# Altium PCB 6P1.PcbDoc
Units mil, origin at the board's own origin, x right, y up, seen from the top; angles counter-clockwise.
Board outline 2135 x 1345 mil, 2 copper layers (Top Layer, Bottom Layer); 3 components, 8 nets, 30 pads, 0 vias.
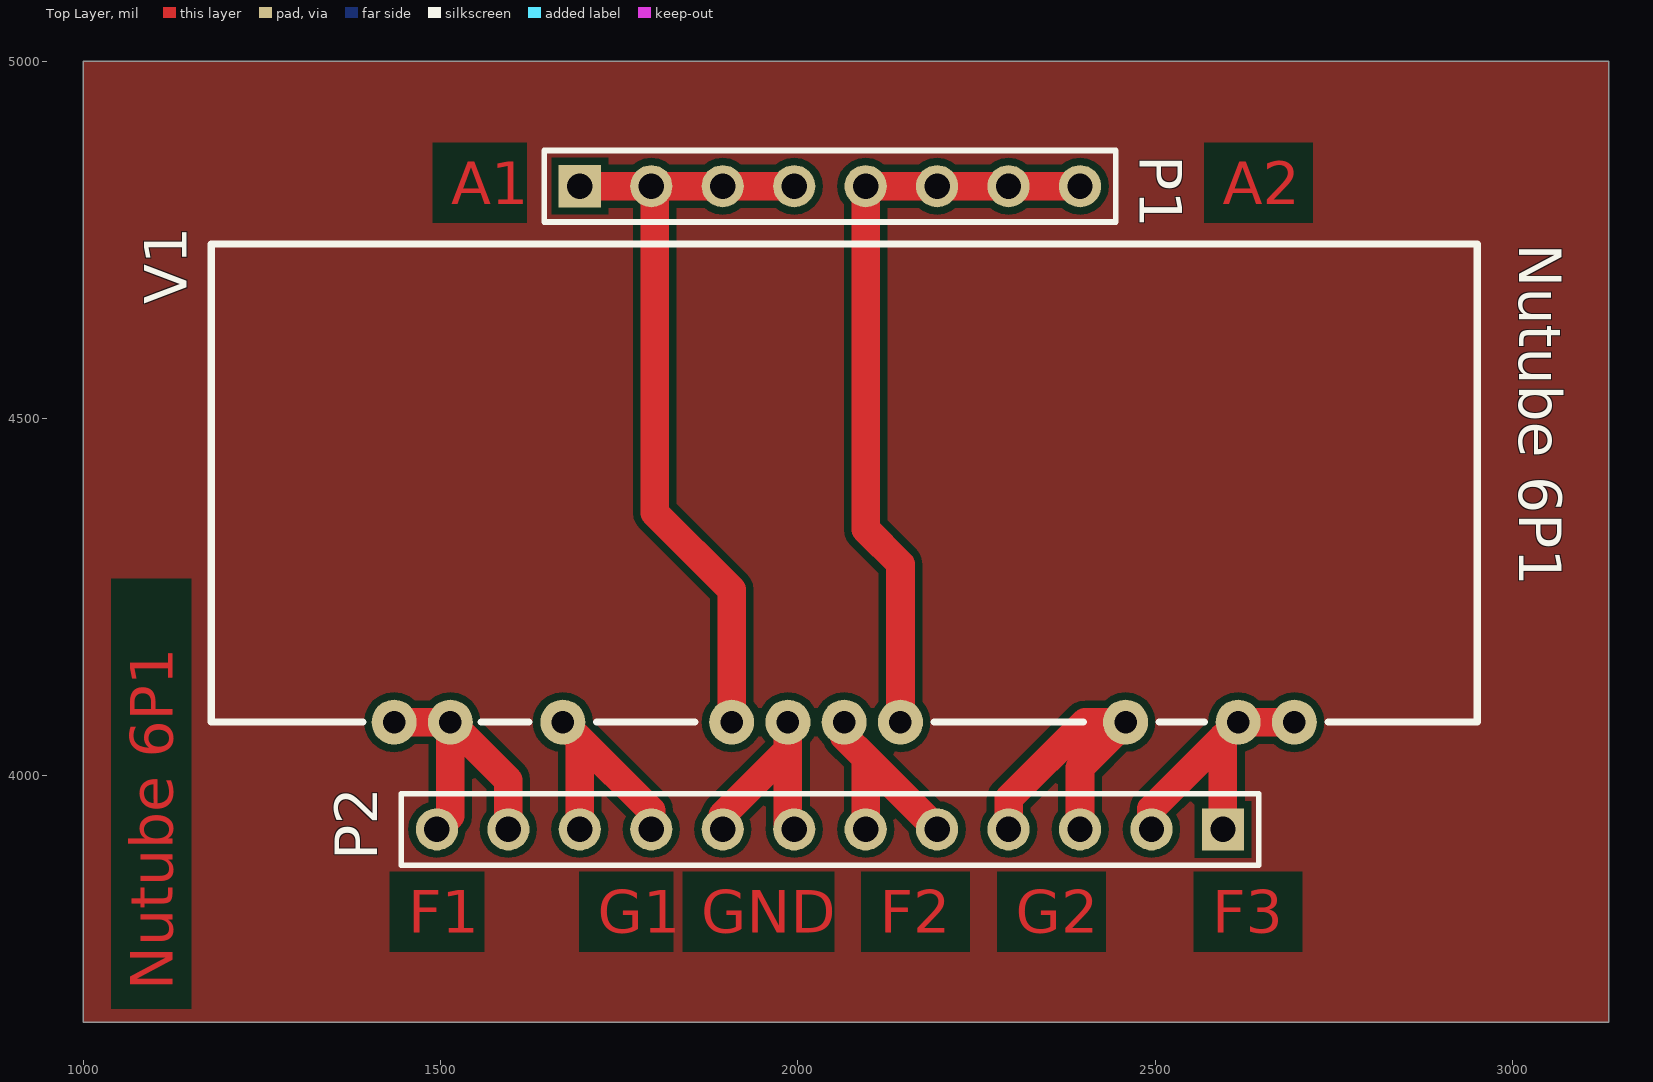
[diagram p0: Top Layer view]
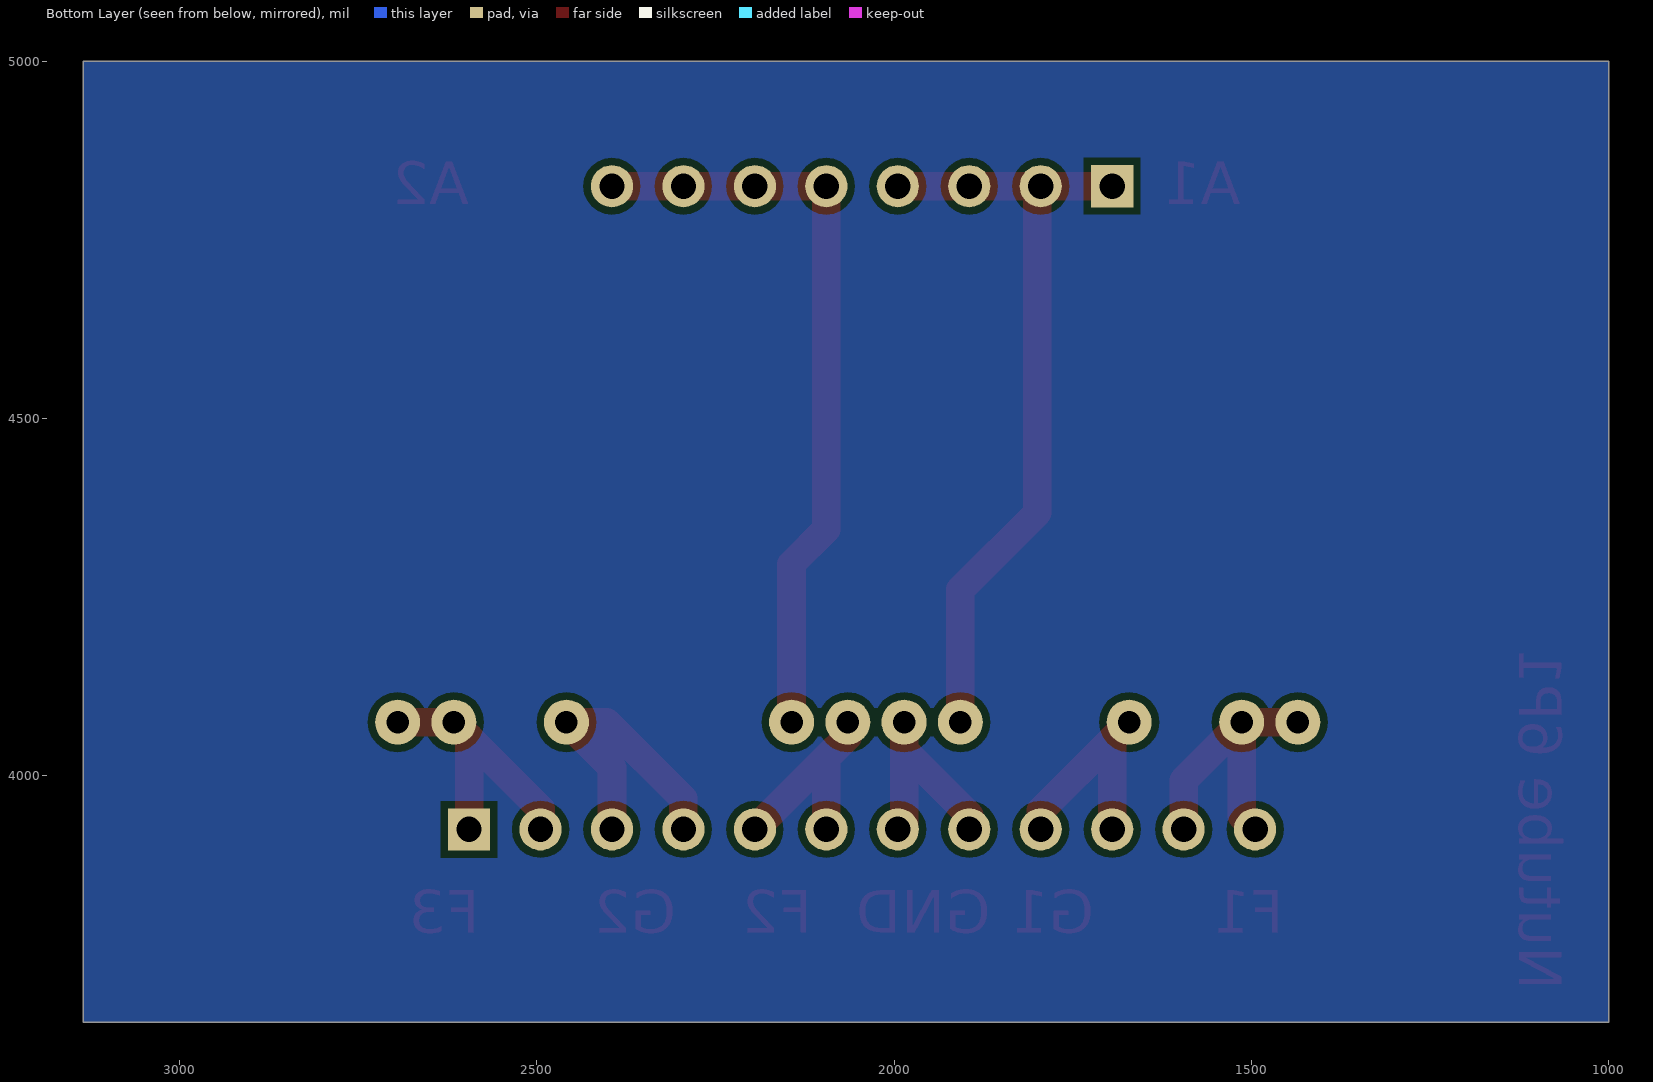
[diagram p1: Bottom Layer view, seen from below]

## Layer stack, top to bottom
Top Solder: solder mask 0.4, Solder Resist, Dk 3.5
Top Layer: signal copper 1.4
Dielectric 1: dielectric 12.6, FR-4, Dk 4.8
Bottom Layer: signal copper 1.4
Bottom Solder: solder mask 0.4, Solder Resist, Dk 3.5

## Board outline
1000,3655 3135,3655 3135,5000 1000,5000

## Design rules (kind name [scope] priority, off if disabled: settings)
Clearance [All] p1: gap=10
PlaneConnect [InNet('NetP2_8')] p1: planeconnectstyle=Direct reliefexpansion=20 reliefentries=4 reliefconductorwidth=10 reliefairgap=10
PolygonConnect [All] p1: connectstyle=Relief reliefconductorwidth=10 reliefentries=4 polygonreliefangle="90 Angle" airgapwidth=10
RoutingVias [All] p1: holewidth=28 width=50 viastyle="Through Hole" minholewidth=28 minwidth=50 maxholewidth=28 maxwidth=50
SolderMaskExpansion [All] p1: expansion=4
Width [All] p1: maxlimit=40 minlimit=40 preferedwidth=40
29 further rules are at their usual default settings.

## Components (designator, comment, footprint, x,y, rotation, side; value= is the part's Value field where it differs from the comment)
P1 "Header 8" HDR1X8 1695,4825 r0 top
P2 "Header 12" HDR1X12 2595,3925 r180 top
V1 "Nutube 6P1" "Nutube 6P1" 2065,4390 r0 top

## Footprints (in the part's own frame and the unit in brackets; to place one, negate y for a bottom-side part, rotate by r counter-clockwise, add the part's x,y. Pads: shape width x height; smd on the part's side, far side on the other; paste and mask are expansions set on the pad)
HDR1X8 [mm] "Connector; Header; 8 Position"
  rect 1.5x1.5 hole 0.9: 1(0,0)
  round 1.5 hole 0.9: 2(2.54,0) 3(5.08,0) 4(7.62,0) 5(10.16,0) 6(12.7,0) 7(15.24,0) 8(17.78,0)
  silkscreen extent -1.27,-1.27 19.05,1.27
HDR1X12 [mm] "Connector; Header; 12 Position"
  rect 1.5x1.5 hole 0.9: 1(0,0)
  round 1.5 hole 0.9: 2(2.54,0) 3(5.08,0) 4(7.62,0) 5(10.16,0) 6(12.7,0) 7(15.24,0) 8(17.78,0) 9(20.32,0) 10(22.86,0) 11(25.4,0) 12(27.94,0)
  silkscreen extent -1.27,-1.27 29.21,1.27
"Nutube 6P1" [mm]
  round 1.6 hole 0.8: 1(-16,-8) 2(-14,-8) 3(-10,-8) 4(-4,-8) 5(-2,-8) 6(0,-8) 7(2,-8) 8(10,-8) 9(14,-8) 10(16,-8)
  silkscreen extent -22.5,-8 22.5,9

## Part data
P1: "Header, 8-Pin"
P2: "Header, 12-Pin"

## Nets (pads, with @x,y where several pads share a name; then routed paths per layer and width w, separated by ;. In a path a pad name is that pad's centre, name@x,y a point inside that pad or via, vN(x,y) a via of type N, cw(c..) or ccw(c..) an arc to the next point about the centre after c; other vN are vias at no path point)
NetP1_1: P1.1 P1.2 P1.3 P1.4 V1.4 | length 1096.6
  Top Layer w40: P1.1 P1.2 ; V1.4 1907.52,4260.27 1800,4367.79 1800,4820 P1.2 ; P1.4 P1.3 P1.2
NetP1_5: P1.5 P1.6 P1.7 P1.8 V1.7 | length 1070.1
  Top Layer w40: V1.7 2143.74,4296.26 2095,4345 P1.5 P1.6 P1.7 P1.8
NetP2_1: P2.1 P2.2 V1.9 V1.10 | length 407.8
  Top Layer w40: P2.2 2495,3953.86 V1.9@2595,4053.86 ; P2.1 V1.9@2595,4053.86 ; V1.10 V1.9 V1.9@2595,4053.86
NetP2_3: P2.3 P2.4 V1.8 | length 427.3
  Top Layer w40: P2.4 2295,3967.79 2402.25,4075.04 V1.8 2395,4011.34 P2.3
NetP2_5: P2.5 P2.6 V1.6 | length 303.9
  Top Layer w40: V1.6 2065,4055 2095,4025 ; P2.6 2095,4025 ; P2.5 2095,4025
NetP2_7: P2.7 P2.8 V1.5 | length 290.4
  Top Layer w40: P2.8 1895,3945 1986.26,4036.26 ; P2.7@1986.26,3933.74 1986.26,4036.26 ; V1.5 1986.26,4036.26
NetP2_9: P2.9 P2.10 V1.3 | length 327.6
  Top Layer w40: V1.3 1695,4051.34 ; P2.10 1695,4051.34 ; P2.9 1795,3951.34 1695,4051.34
NetP2_11: P2.11 P2.12 V1.1 V1.2 | length 420.2
  Top Layer w40: V1.1 V1.2 ; P2.12 1513.82,3943.82 V1.2 ; P2.11 1595,3993.86 V1.2

## Polygon pours and split planes (outlines as drawn)
no net on Top Layer "tlayer - GND" (solid, pour order 0): 1000,5000 3135,5000 3135,3655 1000,3655
no net on Bottom Layer "tlayer - GND" (solid, pour order 2): 1000,5000 3135,5000 3135,3655 1000,3655

## Other copper
Top Layer:
  text "A1" at 1515,4800 h60
  text "A2" at 2595,4800 h60
  text "F1" at 1455,3780 h60
  text "G1" at 1720,3780 h60
  text "GND" at 1865,3780 h60
  text "F2" at 2115,3780 h60
  text "G2" at 2305,3780 h60
  text "F3" at 2580,3780 h60
  text "Nutube 6P1" at 1125,3700 h60 r90